# Altium PCB PCB2.PcbDoc
Units mm, origin at the board's own origin, x right, y up, seen from the top; angles counter-clockwise.
Board outline 74.3 x 67.39 mm, 4 copper layers (Top Layer, GND_PLANE, PWR_PLANE, Bottom Layer), stack 0.603 mm thick; 62 components, 65 nets, 250 pads, 141 vias.
Unrouted connection lines stored in the file: 3.
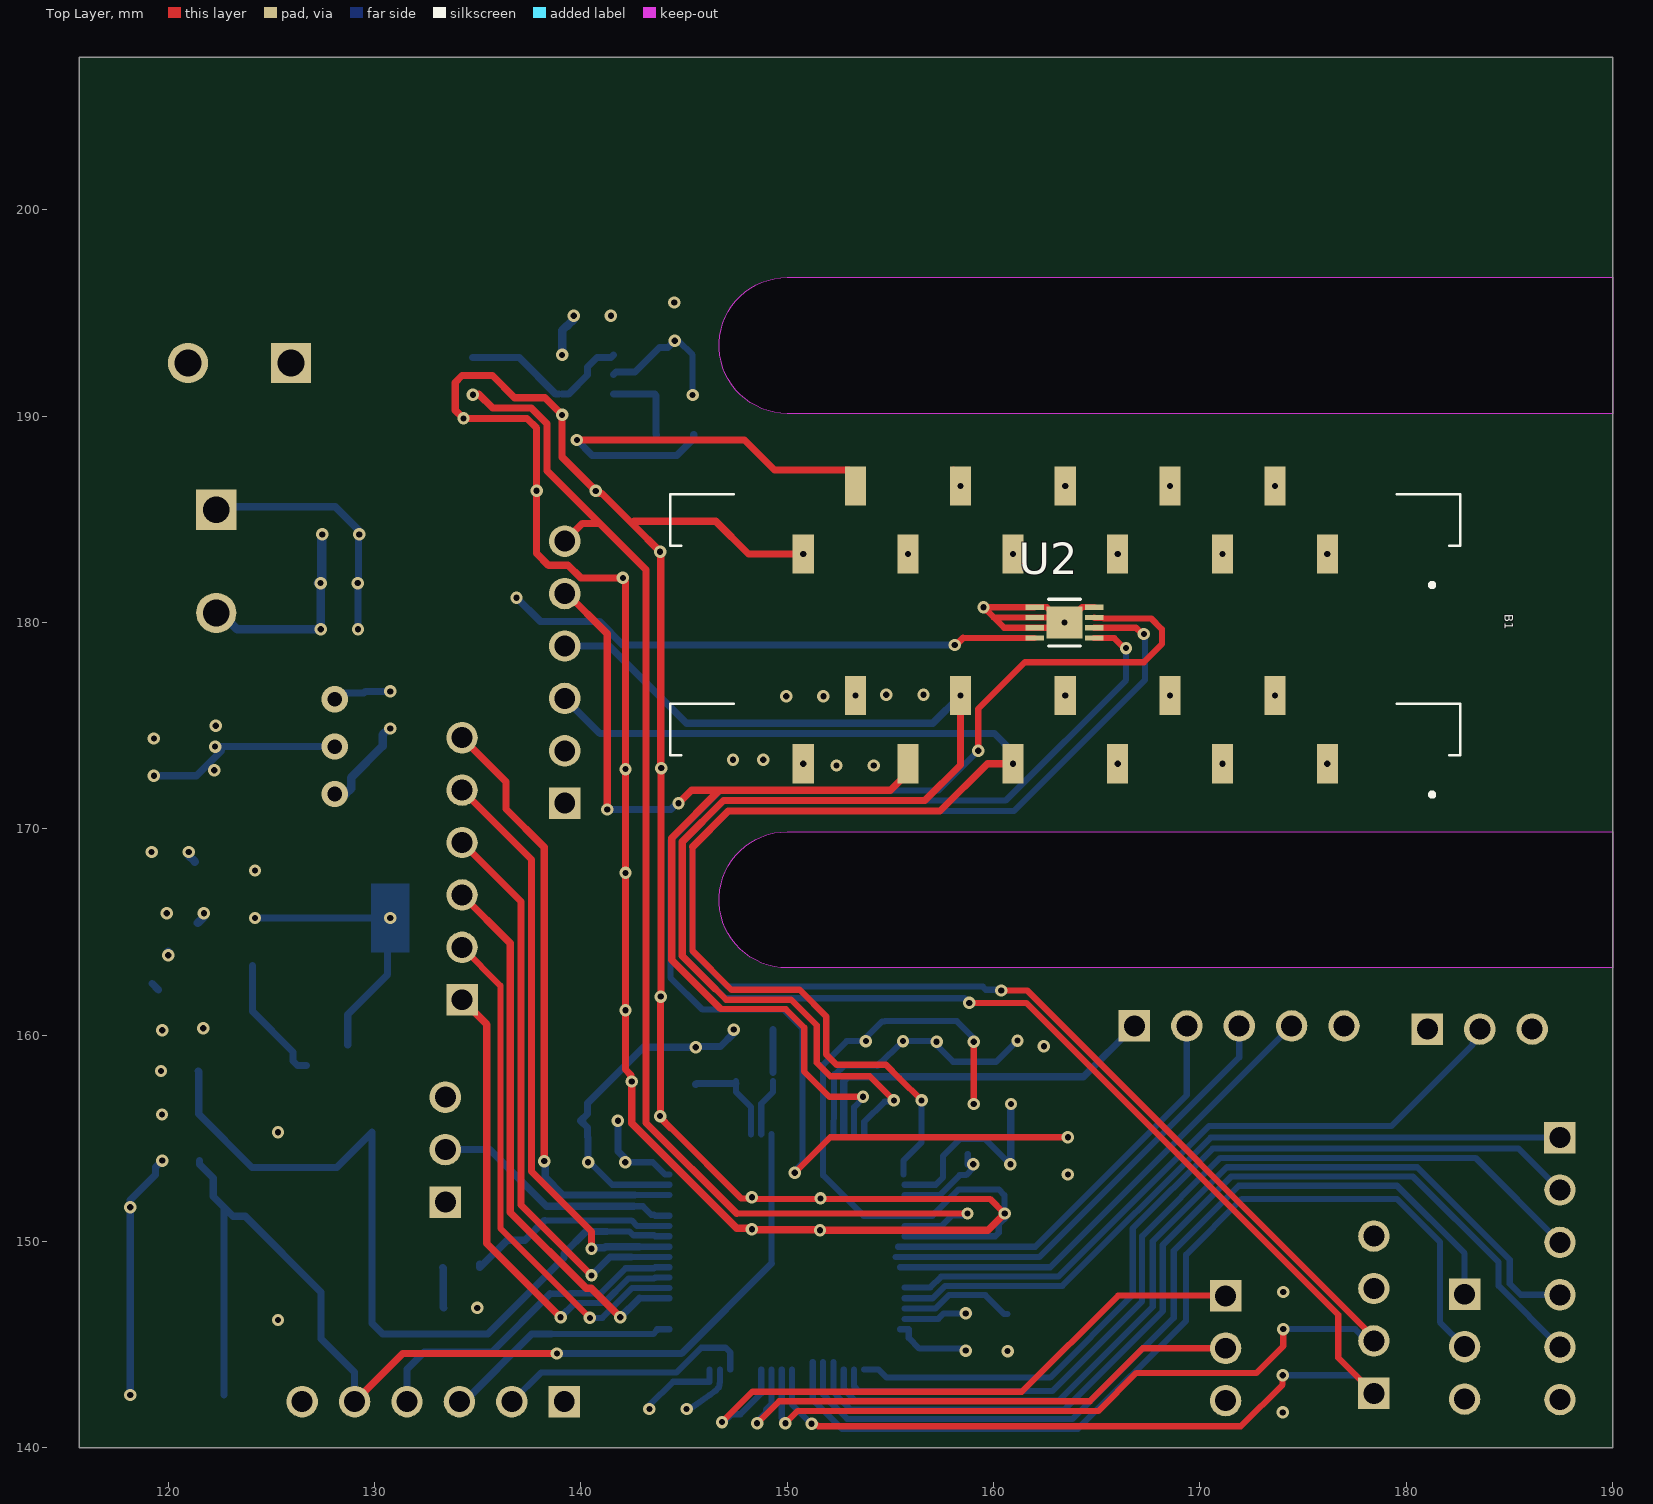
[diagram p0: Top Layer view]
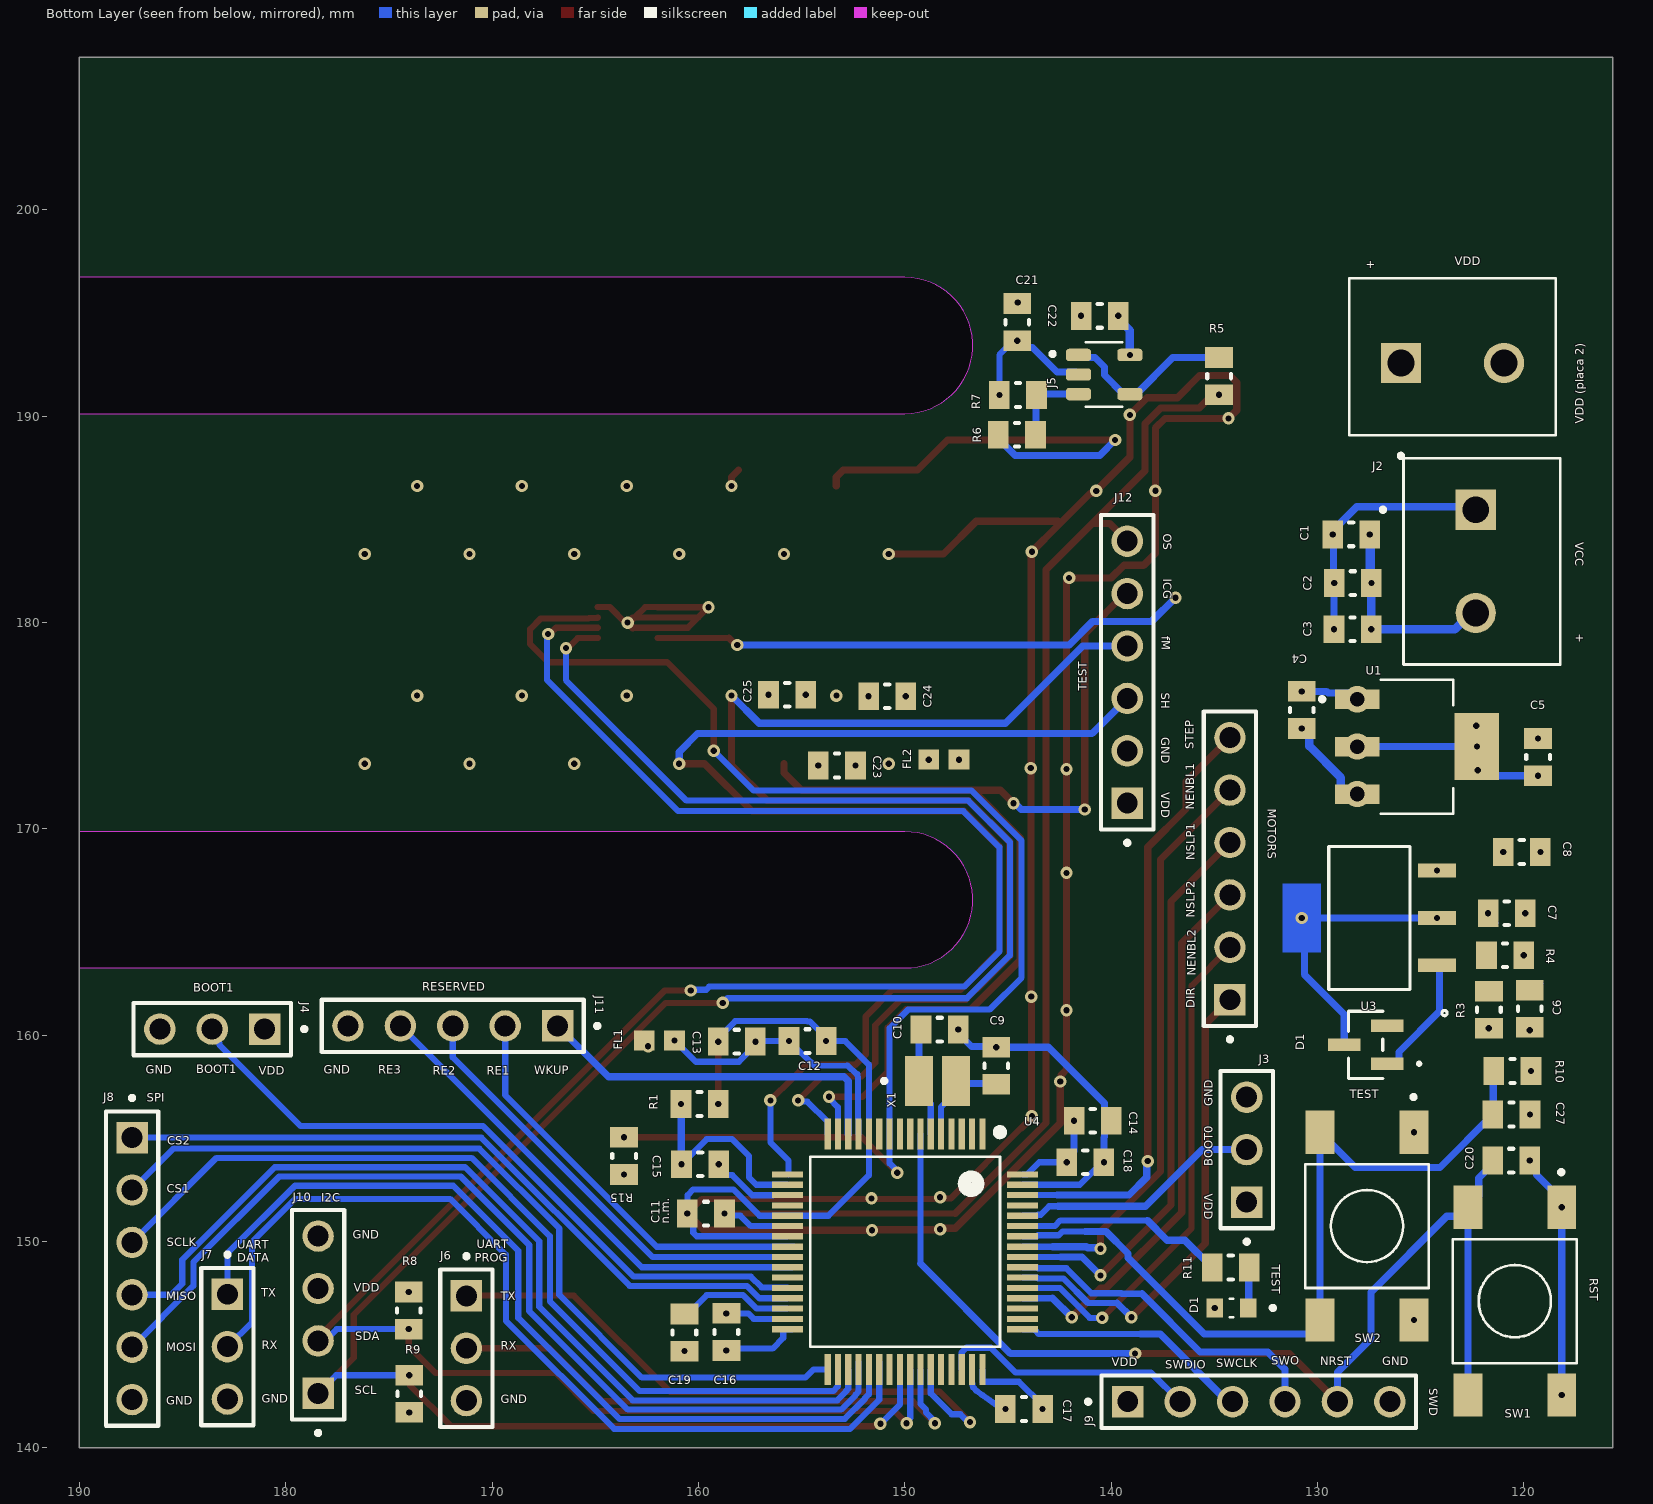
[diagram p1: Bottom Layer view, seen from below]
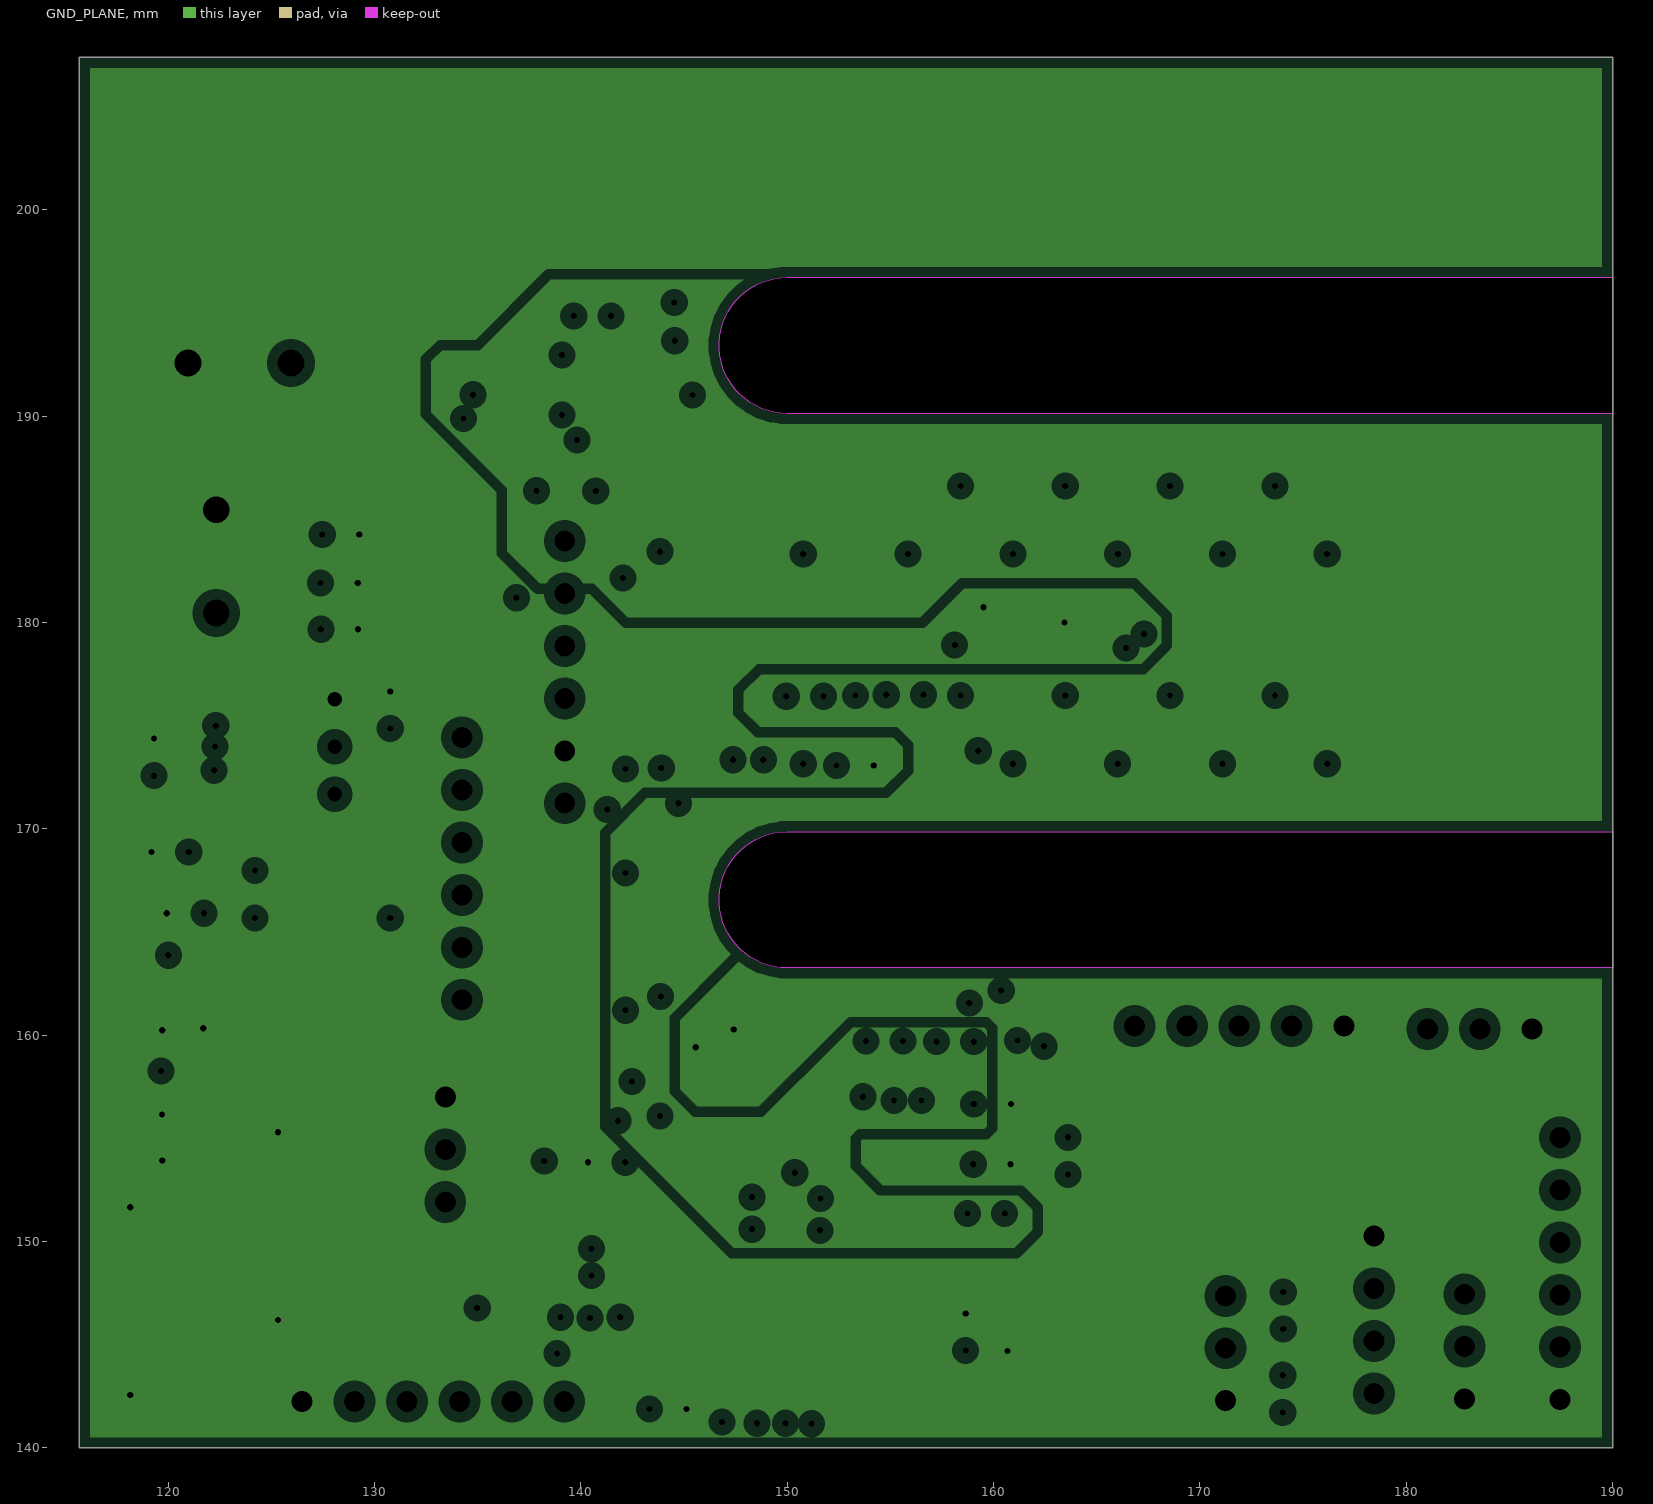
[diagram p2: GND_PLANE, clearances drawn from the general rule]
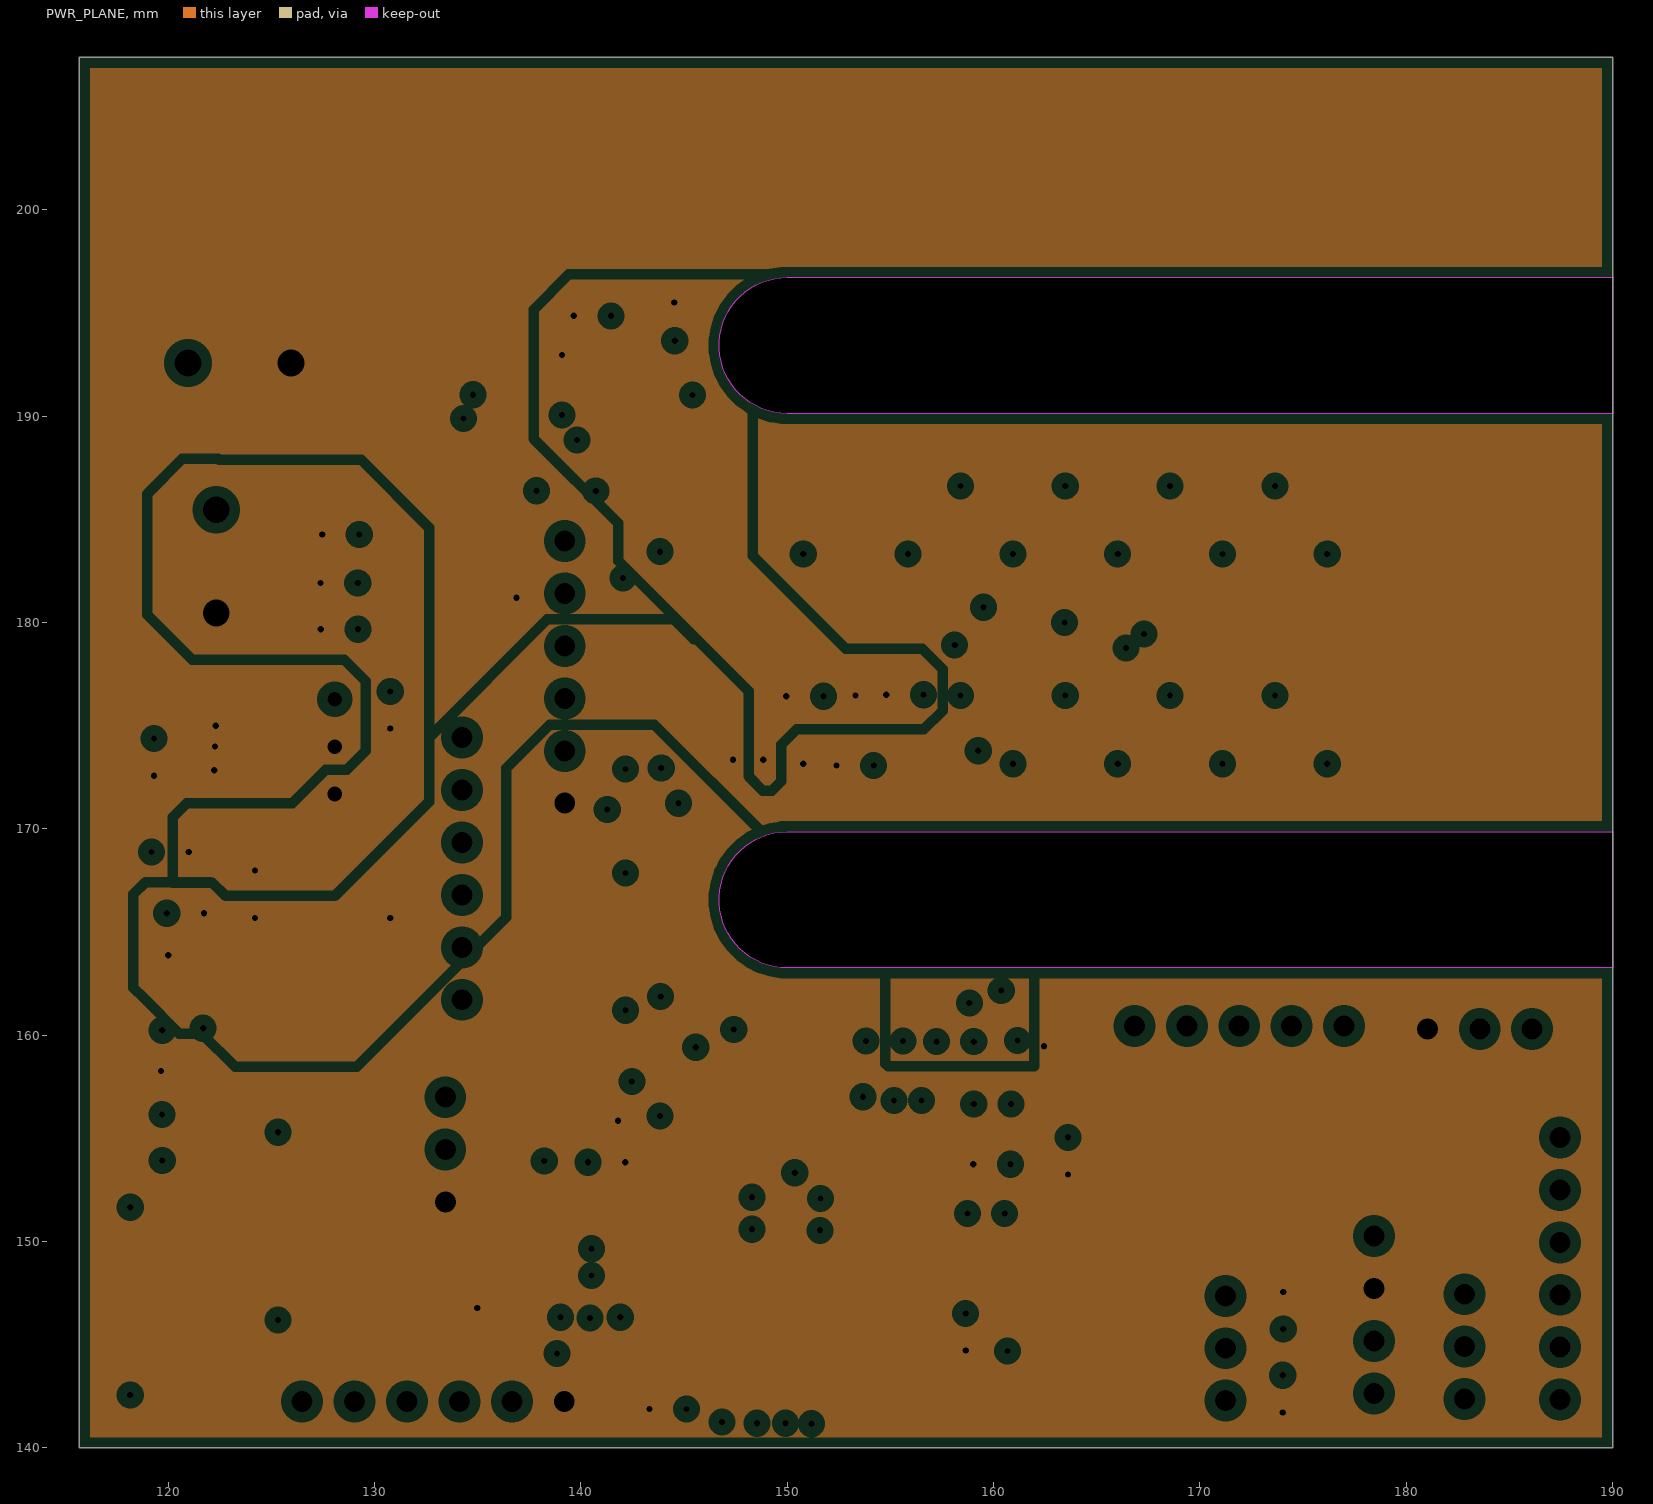
[diagram p3: PWR_PLANE, clearances drawn from the general rule]

## Layer stack, top to bottom
Top Solder: solder mask 0.0102, Solder Resist, Dk 3.5
Top Layer: signal copper 0.0356
Dielectric 2: prepreg 0.0711, PP-006, Dk 4.1
GND_PLANE: plane copper 0.035, net GND
Dielectric 1: dielectric 0.32, FR-4, Dk 4.8
PWR_PLANE: plane copper 0.035, net (Multiple Nets)
Dielectric 3: prepreg 0.0711, PP-006, Dk 4.1
Bottom Layer: signal copper 0.0356
Bottom Solder: solder mask 0.0102, Solder Resist, Dk 3.5

## Board outline
115.697,140 115.697,207.391 190,207.391 190,140
cut-out: 150,163.265 cw(c150,166.565) 150,169.865 190,169.865 190,163.265
cut-out: 150,190.135 cw(c150,193.435) 150,196.735 190,196.735 190,190.135

## Design rules (kind name [scope] priority, off if disabled: settings)
BoardOutlineClearance [All] p1: gap=0.5 ignorepadtopadclearanceinfootprint=FALSE
Clearance Clearance_bridges [All vs InComponent('SB4_MD1') OR InComponent('SB5_MD1') OR InComponent('SB6_MD1') OR InComponent('SB4_MD2') OR InComponent('SB5_MD2') OR InComponent('SB6_MD2')] p1: gap=0.05 ignorepadtopadclearanceinfootprint=FALSE
Clearance [All] p2: gap=0.15 ignorepadtopadclearanceinfootprint=FALSE
PlaneClearance [All] p1: clearance=0.508
PlaneConnect [All] p1: planeconnectstyle=Relief reliefexpansion=0.508 reliefentries=4 reliefconductorwidth=0.254 reliefairgap=0.254
PolygonConnect [All] p1: connectstyle=Relief reliefconductorwidth=0.254 reliefentries=4 polygonreliefangle="90 Angle" airgapwidth=0.254
RoutingVias [All] p1: holewidth=0.6 width=1 viastyle="Through Hole" minholewidth=0.3 minwidth=0.5 maxholewidth=0.3 maxwidth=0.6
ShortCircuit ShortCircuit_bridges [All vs InComponent('SB4_MD1') OR InComponent('SB5_MD1') OR InComponent('SB6_MD1') OR InComponent('SB4_MD2') OR InComponent('SB5_MD2') OR InComponent('SB6_MD2')] p1: allowed=TRUE
ShortCircuit [All] p2: allowed=FALSE
SolderMaskExpansion [All] p1: expansion=0.102 istentingtop=FALSE
SupplyNets "Schematic Supply Nets_3" [InNet('VBB')] p1: voltage=0.000
SupplyNets "Schematic Supply Nets_8" [InNet('VTCDA')] p2: voltage=0.000
SupplyNets "Schematic Supply Nets_7" [InNet('VDD')] p3: voltage=0.000
SupplyNets "Schematic Supply Nets_6" [InNet('PGND')] p4: voltage=0.000
SupplyNets "Schematic Supply Nets_5" [InNet('AGND')] p5: voltage=0.000
SupplyNets "Schematic Supply Nets_4" [InNet('GND')] p6: voltage=0.000
SupplyNets "Schematic Supply Nets_2" [InNet('VDDA')] p7: voltage=0.000
SupplyNets "Schematic Supply Nets_1" [InNet('VCC')] p8: voltage=0.000
SupplyNets "Schematic Supply Nets" [InNet('VTCD')] p9: voltage=0.000
Width Width_bridges [InComponent('SB4_MD1') OR InComponent('SB5_MD1') OR InComponent('SB6_MD1') OR InComponent('SB4_MD2') OR InComponent('SB5_MD2') OR InComponent('SB6_MD2')] p1: maxlimit=0.254 minlimit=0.15 preferedwidth=0.2
Width Width_motores [InNet('VBB')] p2: maxlimit=2 minlimit=0.5 preferedwidth=1
Width [All] p3: maxlimit=1 minlimit=0.2 preferedwidth=0.25
27 further rules are at their usual default settings.

## Classes and differential pairs
channel class MotorDriver: MD1 MD2
component class U_Sensor: B1 C21 C22 C23 C24 C25 FL2 J5 R5 R6 R7 R15 U2
component class U_Power: C1 C2 C3 C4 C5 C6 C7 C8 D1 J2 R1 R3 R4 U1 U3
component class U_Out: C27 D1 J6 J7 J8 J9 J10 J11 J12 R8 R9 R10 R11 SW2
component class U_Microcontroller: C9 C10 C11 C12 C13 C14 C15 C16 C17 C18 C19 C20 FL1 J3 J4 SW1 U4 X1

## Components (designator, comment, footprint, x,y, rotation, side; value= is the part's Value field where it differs from the comment)
B1 "TCD1304DG_8Z_AW_" SOCKET-15_SMD-HARWIN_M20-7861546 163.435,180 r0 top locked
C1 "4.7uF" RES_0805 128.361,184.277 r180 bottom
C2 "100nF" RES_0805 128.284,181.915 r180 bottom
C3 "100pF" RES_0805 128.295,179.68 r180 bottom
C4 "10uF" RES_0805 130.759,175.768 r270 bottom
C5 "10uF" RES_0805 119.304,173.482 r270 bottom
C6 "22uF" RES_0805 119.71,161.29 r90 bottom
C7 "10uF" RES_0805 120.828,165.913 r0 bottom
C8 "10uF" RES_0805 120.091,168.885 r0 bottom
C9 "10pF" RES_0805 145.567,158.521 r270 bottom
C10 "10pF" RES_0805 148.311,160.274 r0 bottom
C11 "100pF not mount" RES_0805 159.639,151.359 r180 bottom
C12 "4.7uF" RES_0805 154.711,159.715 r180 bottom
C13 "100nF" RES_0805 158.14,159.69 r0 bottom
C14 "4.7uF" RES_0805 140.894,155.854 r180 bottom
C15 "100nF" RES_0805 159.918,153.746 r0 bottom
C16 "100nF" RES_0805 158.648,145.618 r90 bottom
C17 "100nF" RES_0805 144.221,141.884 r0 bottom
C18 "100nF" RES_0805 141.249,153.848 r180 bottom
C19 "4.7uF" RES_0805 160.68,145.593 r90 bottom
C20 "100nF" RES_0805 120.61,153.924 r180 bottom
C21 "10uF" RES_0805 144.551,194.564 r270 bottom
C22 "100nF" RES_0805 140.553,194.869 r0 bottom
C23 "10uF" RES_0805 153.289,173.076 r0 bottom
C24 "10uF" RES_0805 150.851,176.428 r0 bottom
C25 "100nF" RES_0805 155.702,176.505 r0 bottom
C27 "100nF" RES_0805 120.599,156.159 r180 bottom
D1 "BAS40-7-F" SOT-23_DIO-M 127.66,159.537 r90 bottom
D1 "LED" LEDC1608X35N 134.163,146.787 r0 bottom
FL1 "BEAD" BEADC1608X95N 161.898,159.741 r180 bottom
FL2 "BEAD" BEADC1608X95N 148.107,173.355 r0 bottom
J2 "Bornera" CUI_TB002-500-02BE 122.326,185.471 r270 bottom
J3 "PIN_HEADER_3" GEN_PIN3 133.426,154.457 r90 bottom
J4 "PIN_HEADER_3" GEN_PIN3 183.566,160.299 r0 bottom
J5 "OPAMP" SOT95P280X145-5N 140.335,192.024 r180 bottom
J6 "PIN_HEADER_3" GEN_PIN3 171.247,144.831 r270 bottom
J7 "PIN_HEADER_3" GEN_PIN3 182.829,144.907 r270 bottom
J8 "PIN_HEADER_6" GEN_PIN6 187.452,148.692 r270 bottom
J9 "PIN_HEADER_6" GEN_PIN6 132.842,142.24 r180 bottom
J10 "PIN_HEADER_4" GEN_PIN4 178.435,146.456 r90 bottom
J11 "PIN_HEADER_5" GEN_PIN5 171.907,160.452 r0 bottom
J12 "PIN_HEADER_6" GEN_PIN6 139.217,177.597 r90 bottom
MOTORS "Comment" GEN_PIN6 134.239,168.072 r90 bottom
R1 "0" RES_0805 159.944,156.667 r0 bottom
R3 "220" RES_0805 121.691,161.239 r90 bottom
R4 "100" RES_0805 120.904,163.881 r0 bottom
R5 "100" RES_0805 134.763,191.947 r90 bottom
R6 "1k" RES_0805 144.566,189.103 r180 bottom
R7 "4.7k" RES_0805 144.515,191.033 r0 bottom
R8 "10k" RES_0805 174.041,146.66 r90 bottom
R9 "10k" RES_0805 174.015,142.621 r270 bottom
R10 "10k" RES_0805 120.548,158.267 r180 bottom
R11 "330" RES_0805 134.203,148.742 r180 bottom
R15 "10k" RES_0805 163.601,154.153 r270 bottom
SW1 "BOTON" SW_4-1437565-2 120.432,147.113 r270 bottom
SW2 "BOTON" SW_4-1437565-2 127.595,150.752 r270 bottom
U1 "NCV1117ST33T3G" SOT230P700X180-4N 125.171,173.99 r180 bottom
U2 "MCP9808T-E/MC" DFN8_2x3MC_MCH-M 163.435,180 r180 top
U3 "NCV1117STAT3G" SOT223-3_ONS-M 127.483,165.684 r90 bottom
U4 "STM32F446RCT6TR" QFP50P1200X1200X160-64N 149.987,149.504 r270 bottom
"VDD (placa 2)" "Comment" CUI_TB002-500-02BE 125.955,192.583 r180 bottom
X1 "CRISTAL-8M" XTALDFN320X250X100-2N 148.412,157.785 r180 bottom

## Footprints (in the part's own frame and the unit in brackets; to place one, negate y for a bottom-side part, rotate by r counter-clockwise, add the part's x,y. Pads: shape width x height; smd on the part's side, far side on the other; paste and mask are expansions set on the pad)
BEADC1608X95N [mm]
  rect 1x0.97 smd: 1(-0.735,0) 2(0.735,0)
  body extent -0.8,-0.4 0.8,0.4, height 0.95
CUI_TB002-500-02BE [mm]
  rect 1.95x1.95 / inner round 1.95 / far side rect 1.95x1.95 hole 1.3: 1(0,0)
  round 1.95 hole 1.3: 2(5,0)
  silkscreen extent -2.5,-4.6 7.5,4.1, body extent -2.52,-4.08 7.98,3.52, height 10
DFN8_2x3MC_MCH-M [mm]
  rect 0.908x0.255 smd paste+0 mask+0: 1(-1.445,0.75) 2(-1.445,0.25) 3(-1.445,-0.25) 4(-1.445,-0.75) 5(1.445,-0.75) 6(1.445,-0.25) 7(1.445,0.25) 8(1.445,0.75)
  rect 1.753x1.549 smd paste+0 mask+0: 9(0,0)
  silkscreen extent -0.77,-1.13 0.77,1.13, body extent -1.5,-1 1.5,1, height 0.94
GEN_PIN3 [mil] "Generic 40 mils drill size, 100 mils step"
  rect 60x60 / inner round 60 / far side rect 60x60 hole 40: 01(-100,0)
  round 60 hole 40: 02(0,0) 03(100,0)
  silkscreen extent -180,-50 150,50, body extent -150,-50 150,50, height 337
GEN_PIN4 [mil] "Generic 40 mils drill size, 100 mils step"
  rect 60x60 hole 40: 01(-150,0)
  round 60 hole 40: 02(-50,0) 03(50,0) 04(150,0)
  silkscreen extent -230,-50 200,50, body extent -200,-50 200,50, height 337
GEN_PIN5 [mil] "Generic 40 mils drill size, 100 mils step"
  rect 60x60 hole 40: 01(-200,0)
  round 60 hole 40: 02(-100,0) 03(0,0) 04(100,0) 05(200,0)
  silkscreen extent -280,-50 250,50, body extent -250,-50 250,50, height 337
GEN_PIN6 [mil] "Generic 40 mils drill size, 100 mils step"
  rect 60x60 / inner round 60 / far side rect 60x60 hole 40: 01(-250,0)
  round 60 hole 40: 02(-150,0) 03(-50,0) 04(50,0) 05(150,0) 06(250,0)
  silkscreen extent -330,-50 300,50, body extent -300,-50 300,50, height 337
LEDC1608X35N [mm]
  rect 0.81x0.93 smd: A(0.81,0) C(-0.81,0)
  silkscreen extent -2.1,-0.45 0.09,0.45, body extent -0.8,-0.4 0.8,0.4, height 0.8
QFP50P1200X1200X160-64N [mm]
  rect 1.5x0.3 smd: 1(-5.7,3.75) 2(-5.7,3.25) 3(-5.7,2.75) 4(-5.7,2.25) 5(-5.7,1.75) 6(-5.7,1.25) 7(-5.7,0.75) 8(-5.7,0.25) 9(-5.7,-0.25) 10(-5.7,-0.75) 11(-5.7,-1.25) 12(-5.7,-1.75) 13(-5.7,-2.25) 14(-5.7,-2.75) 15(-5.7,-3.25) 16(-5.7,-3.75) 33(5.7,-3.75) 34(5.7,-3.25) 35(5.7,-2.75) 36(5.7,-2.25) 37(5.7,-1.75) 38(5.7,-1.25) 39(5.7,-0.75) 40(5.7,-0.25) 41(5.7,0.25) 42(5.7,0.75) 43(5.7,1.25) 44(5.7,1.75) 45(5.7,2.25) 46(5.7,2.75) 47(5.7,3.25) 48(5.7,3.75)
  rect 0.3x1.5 smd: 17(-3.75,-5.7) 18(-3.25,-5.7) 19(-2.75,-5.7) 20(-2.25,-5.7) 21(-1.75,-5.7) 22(-1.25,-5.7) 23(-0.75,-5.7) 24(-0.25,-5.7) 25(0.25,-5.7) 26(0.75,-5.7) 27(1.25,-5.7) 28(1.75,-5.7) 29(2.25,-5.7) 30(2.75,-5.7) 31(3.25,-5.7) 32(3.75,-5.7) 49(3.75,5.7) 50(3.25,5.7) 51(2.75,5.7) 52(2.25,5.7) 53(1.75,5.7) 54(1.25,5.7) 55(0.75,5.7) 56(0.25,5.7) 57(-0.25,5.7) 58(-0.75,5.7) 59(-1.25,5.7) 60(-1.75,5.7) 61(-2.25,5.7) 62(-2.75,5.7) 63(-3.25,5.7) 64(-3.75,5.7)
  silkscreen extent -6.08,-4.6 4.6,4.88, body extent -6,-6 6,6, height 1.6
RES_0805 [mm] "Chip Resistor, 2-Leads, Body 2.00x1.25mm, IPC Medium Density"
  rect 1x1.35 smd: 1(-0.9,0) 2(0.9,0)
  silkscreen extent -0.1,-0.58 0.1,0.58, body extent -1.05,-0.67 1.05,0.67, height 0.6
SOCKET-15_SMD-HARWIN_M20-7861546 [mm]
  rect 1.02x1.9 smd: 1(-12.659,-6.837) 2(-10.119,-3.537) 3(-7.579,-6.837) 4(-5.039,-3.537) 5(-2.499,-6.837) 6(0.041,-3.537) 7(2.581,-6.837) 8(5.121,-3.537) 9(7.661,-6.837) 10(10.201,-3.537) 11(12.741,-6.837) 12(12.741,3.323) 13(10.201,6.623) 14(7.661,3.323) 15(5.121,6.623) 16(2.581,3.323) 17(0.041,6.623) 18(-2.499,3.323) 19(-5.039,6.623) 20(-7.579,3.323) 21(-10.119,6.623) 22(-12.659,3.323)
  silkscreen extent -19.11,-8.44 19.19,6.22, body extent -20.8,-7.08 20.8,7.08, height 11.34
SOT95P280X145-5N [mm]
  rrect50% 1.22x0.6 smd: 1(-1.245,0.95) 2(-1.245,0) 3(-1.245,-0.95) 4(1.245,-0.95) 5(1.245,0.95)
  silkscreen extent -2.6,-1.57 0.88,1.57, body extent -1.35,-1.45 1.35,1.45, height 1.45
SOT223-3_ONS-M [mil]
  rect 26x73 smd paste+0 mask+0: 1(-90.5,-129) 2(0,-129) 3(90.5,-129)
  round 1 smd: 4(0,129)
  Top Layer region: 65,92.5 65,165.5 -65,165.5 -65,92.5
  silkscreen extent -186,-148 136,78, body extent -131,-144 131,144, height 68
SOT230P700X180-4N [mm]
  rect 2.15x0.95 smd paste+0 mask+0.102: 1(-2.9,2.3) 2(-2.9,0) 3(-2.9,-2.3)
  rect 2.15x3.25 smd paste+0 mask+0.102: 4(2.9,0)
  silkscreen extent -4.7,-3.25 1.75,3.25, body extent -3.5,-3.25 3.5,3.25, height 1.8
SOT-23_DIO-M [mil]
  rect 24x62 smd paste+0 mask+0: 1(-36.02,-41) 2(36.02,-41) 3(0,41)
  silkscreen extent -64,-105 64,33, body extent -59,-50 59,50, height 45
SW_4-1437565-2 [mm]
  rect 2.1x1.4 smd: 1(-4.55,2.275) 2(4.55,2.275) 3(-4.55,-2.275) 4(4.55,-2.275)
  silkscreen extent -6.35,-3 3,3, body extent -5,-3 5,3, height 5.38
XTALDFN320X250X100-2N [mm]
  rect 1.37x2.43 smd: 1(-0.9,0) 2(0.9,0)
  silkscreen extent -2.69,-0.1 -2.49,0.1, body extent -1.6,-1.25 1.6,1.25, height 1

## Part data
B1: "Image Sensors & Color Sensors CCD Linear Sensor 3648 8x20 54mm", Manufacturer_Name=Toshiba, Manufacturer_Part_Number=TCD1304DG(8Z,AW), Mouser Part Number=757-TCD1304DG8ZAW, Datasheet Link=https://datasheet.datasheetarchive.com/originals/distributors/DKDS-29/569259.pdf, Geometry.Height=3.72mm, Mouser Price/Stock=https://www.mouser.co.uk/ProductDetail/Toshiba/TCD1304DG8ZAW?qs=OLJpxlzHOSRVMcyirxbASw%3D%3D
C1 C2 C3 C4 C5 C6 C7 C8 C9 C10 C11 C12 C13 C14 C15 C16 C17 C18 C19 C20 C21 C22 C23 C24 C25 C27: library part CAP_0805, "Generic Capacitor"
D1: library part DIODE-BAS40-7-F, "Description", Manufacturer_Name="Diodes Inc", Copyright="Copyright (C) 2025 Ultra Librarian. All rights reserved.", Manufacturer_Part_Number=BAS40-7-F, RefDes=RefDes, Type="Diodes - Rectifiers, Single"
D1: library part LED-LTST-C190KRKT, "Red 631nm LED Indication - Discrete 2V 0603 (1608 Metric)", Package="0603 Lite-On", Availability="In Stock", Check_prices=https://www.snapeda.com/parts/LTST-C190KRKT/Lite-On+Inc./view-part/?ref=eda, MF="Lite-On Inc.", MP=LTST-C190KRKT, Price=None, Purchase-URL=https://pricing.snapeda.com/search/part/LTST-C190KRKT/?ref=eda, SnapEDA_Link=https://www.snapeda.com/parts/LTST-C190KRKT/Lite-On+Inc./view-part/?ref=snap
FL1 FL2: library part FERRITE-BLM18AG601SN1D, "600 Ohms @ 100 MHz 1 - Ferrite Bead 0603 (1608 Metric) 500mA 380mOhm", Package="1608 Murata", Availability="In Stock", Check_prices=https://www.snapeda.com/parts/BLM18AG601SN1D/Murata/view-part/?ref=eda, MF=Murata, MP=BLM18AG601SN1D, Price=None, Purchase-URL=https://pricing.snapeda.com/search/part/BLM18AG601SN1D/?ref=eda, SnapEDA_Link=https://www.snapeda.com/parts/BLM18AG601SN1D/Murata/view-part/?ref=snap
J2: library part 2PBorn-TB002-500-02BE, "2~24 Poles, Screw Type, Horizontal, 5.0 Pitch, 22~12 (AWG), Terminal Block Connector", Package=None, Check_prices=https://www.snapeda.com/parts/TB002-500-02BE/Same+Sky/view-part/?ref=eda, MF="Same Sky", MP=TB002-500-02BE, SnapEDA_Link=https://www.snapeda.com/parts/TB002-500-02BE/Same+Sky/view-part/?ref=snap
J3 J4 J6 J7 J8 J9 J10 J11 J12: "Generic 40 mils drill size, 100 mils step", Package=None, MF="Samtec Inc."
  J3 J4 J6 J7: Check_prices=https://www.snapeda.com/parts/TS-103-T-A/Samtec+Inc./view-part/?ref=eda, MP=TS-103-T-A, SnapEDA_Link=https://www.snapeda.com/parts/TS-103-T-A/Samtec+Inc./view-part/?ref=snap
  J8 J9 J12: Check_prices=https://www.snapeda.com/parts/TS-106-T-A/Samtec+Inc./view-part/?ref=eda, MP=TS-106-T-A, SnapEDA_Link=https://www.snapeda.com/parts/TS-106-T-A/Samtec+Inc./view-part/?ref=snap
  J10: Availability="In Stock", Check_prices=https://www.snapeda.com/parts/TS-104-T-A/Samtec+Inc./view-part/?ref=eda, MP=TS-104-T-A, Price=None, Purchase-URL=https://pricing.snapeda.com/search/part/TS-104-T-A/?ref=eda, SnapEDA_Link=https://www.snapeda.com/parts/TS-104-T-A/Samtec+Inc./view-part/?ref=snap
  J11: Availability="In Stock", Check_prices=https://www.snapeda.com/parts/TS-105-T-A/Samtec+Inc./view-part/?ref=eda, MP=TS-105-T-A, Price=None, Purchase-URL=https://pricing.snapeda.com/search/part/TS-105-T-A/?ref=eda, SnapEDA_Link=https://www.snapeda.com/parts/TS-105-T-A/Samtec+Inc./view-part/?ref=snap
J5: library part OPAMP-MCP6001UT-E/OT, "Microchip MCP6001UT-E/OT Op Amp, 1MHz Rail-Rail, 1.8 - 6 V, 5-Pin SOT-23", Package="SOT-23 Microchip", Check_prices=https://www.snapeda.com/parts/MCP6001UT-E/OT/Microchip/view-part/?ref=eda, MF=Microchip, MP=MCP6001UT-E/OT, SnapEDA_Link=https://www.snapeda.com/parts/MCP6001UT-E/OT/Microchip/view-part/?ref=snap
R1 R3 R4 R5 R6 R7 R8 R9 R10 R11 R15: library part RES_0805, "Generic Capacitor"
SW1 SW2: library part SW-4-1437565-2, "Switch Tactile OFF (ON) SPST Round Button Gull Wing 0.05A 24VDC 1VA 9.18N SMD T/R", Package=None, Check_prices=https://www.snapeda.com/parts/FSM4JSMATR/TE+Connectivity+ALCOSWITCH+Switches/view-part/?ref=eda, MF="TE Connectivity", MP=FSM4JSMATR, SnapEDA_Link=https://www.snapeda.com/parts/FSM4JSMATR/TE+Connectivity+ALCOSWITCH+Switches/view-part/?ref=snap
U1: library part REG3_3-NCV1117ST33T3G, "Linear Voltage Regulator IC Positive Fixed 1 Output 1A SOT-223", Package="SOT-223-4 ON Semiconductor", Check_prices=https://www.snapeda.com/parts/NCV1117ST33T3G/Onsemi/view-part/?ref=eda, MF="ON Semiconductor", MP=NCV1117ST33T3G, SnapEDA_Link=https://www.snapeda.com/parts/NCV1117ST33T3G/Onsemi/view-part/?ref=snap
U2: library part MCP9808T-EMC, "Description", Manufacturer_Name=Microchip, Copyright="Copyright (C) 2026 Ultra Librarian. All rights reserved.", Manufacturer_Part_Number=MCP9808T-E/MC, RefDes=RefDes, Type=Type
U3: "Description", Manufacturer_Name=onsemi, Copyright="Copyright (C) 2025 Ultra Librarian. All rights reserved.", Manufacturer_Part_Number=NCV1117STAT3G, RefDes=RefDes, Type=Type
U4: "ARM® Cortex®-M4 STM32F4 Microcontroller IC 32-Bit Single-Core 180MHz 256KB (256K x 8) FLASH 64-LQFP (10x10)", Package="LQFP-64 STMicroelectronics", Check_prices=https://www.snapeda.com/parts/STM32F446RCT6TR/STMicroelectronics/view-part/?ref=eda, MF=STMicroelectronics, MP=STM32F446RCT6TR, SnapEDA_Link=https://www.snapeda.com/parts/STM32F446RCT6TR/STMicroelectronics/view-part/?ref=snap
X1: library part CRISTAL-CG04874-8M, "8 MHz ±20ppm Crystal 8pF 500 Ohms 2-SMD, No Lead", Package="SMD-2 NDK America,", Check_prices=https://www.snapeda.com/parts/CG04874-8M/NDK+America%252C+Inc./view-part/?ref=eda, MF="NDK America, Inc.", MP=CG04874-8M, SnapEDA_Link=https://www.snapeda.com/parts/CG04874-8M/NDK+America%252C+Inc./view-part/?ref=snap

## Via types
v1: diameter 0.6, hole 0.3, Top Layer to Bottom Layer, 138 vias
v2: diameter 1.27, hole 0.711, Top Layer to Bottom Layer, 3 vias

## Nets (pads, with @x,y where several pads share a name; then routed paths per layer and width w, separated by ;. In a path a pad name is that pad's centre, name@x,y a point inside that pad or via, vN(x,y) a via of type N, cw(c..) or ccw(c..) an arc to the next point about the centre after c; other vN are vias at no path point)
AGND: B1.6 B1.7 B1.8 B1.9 B1.10 B1.11 B1.12 B1.13 B1.14 B1.15 B1.16 B1.17 B1.18 B1.19 B1.20 B1.22 C11.1 C12.2 C13.2 C21.2 C22.2 C24.2 C25.2 J5.2 R1.1 R7.2 U4.12 U4.21 U4.23 | length 175
  Top Layer w0.3: 144.348,155.507 147.767,152.089 148.016,152.089 148.266,152.089 148.285,152.07 159.828,152.07 v1(160.539,151.359) ; v1(159.04,159.69) 159.042,159.688 159.042,156.669 v1(159.044,156.667)
  Top Layer w0.35: v1@143.866,161.807 143.853,161.794 143.853,156.096 v1(143.84,156.083) 143.84,156.015 144.348,155.507 ; v1@143.878,161.819 143.878,172.936 v1(143.891,172.949) 143.866,172.974 143.866,183.413 v1(143.84,183.439) 142.57,184.709 ; v1(150.776,183.323) 148.121,183.323 146.533,184.912 142.57,184.912 142.57,184.709 ; B1.19@158.061,187.398 158.396,187.063 v1(158.396,186.623) ; v1(160.539,151.359) 159.726,150.546 151.663,150.546 151.587,150.622 151.536,150.571 148.336,150.571 148.263,150.644 147.556,150.644 142.469,155.731 v1(142.469,157.759) 142.421,157.807 142.421,158.078 142.164,158.335 v1(142.164,161.214) v1(142.164,167.869) v1(142.164,172.898) 142.164,181.974 142.037,182.101 v1(142.037,182.169) 139.993,182.169 139.376,182.786 138.423,182.786 137.854,183.355 v1(137.854,186.392) 137.854,189.429 137.385,189.898 v1(134.307,189.898) 133.909,190.297 133.909,191.643 134.239,191.973 135.712,191.973 136.781,190.904 138.255,190.904 v1(139.09,190.068) 139.09,188.011 v1(140.716,186.385) 140.764,186.337 140.831,186.337 140.909,186.26 141.019,186.26 141.846,185.433 142.57,184.709
  Bottom Layer w0.3: v1(144.551,193.664) 144.726,193.664 145.415,192.975 v1(145.415,191.033) ; U4.23 160.08,150.254 160.256,150.43 160.256,150.834 160.53,151.107 C11.1@160.539,151.107 ; v1(159.04,159.69) 159.04,159.865 158.215,160.69 154.736,160.69 154.711,160.665 154.586,160.665 153.811,159.89 v1(153.811,159.715) 152.883,159.715 151.737,158.57 U4.12 151.737,153.215 153.698,151.254 U4.21 157.036,151.254 158.308,152.527 160.257,152.527 160.528,152.256 160.528,151.369 v1(160.539,151.359)
  Bottom Layer w0.35: J5.2 141.705,192.149 142.619,192.149 143.809,193.339 144.226,193.339 v1(144.551,193.664)
  other v1: 151.587,150.546 148.285,150.597 151.613,152.095 148.285,152.146 143.866,161.874 166.016,173.163 171.096,173.163 176.176,173.163 151.751,176.428 163.476,176.463 168.556,176.463 173.636,176.463 156.602,176.505 155.856,183.323 160.936,183.323 166.016,183.323 171.096,183.323 176.176,183.323 163.476,186.623 168.556,186.623 173.636,186.623 141.453,194.869
BOOT0: J3.02 U4.60 | length 12.2
  Bottom Layer w0.3: 142.563,151.714 143.003,151.714 143.413,151.304 143.549,151.304 143.599,151.254 U4.60
  Bottom Layer w0.35: J3.02 135.585,154.457 138.328,151.714 142.563,151.714
BOOT1: J4.02 U4.28 | length 33.3
  Bottom Layer w0.3: U4.28@155.687,147.777 156.935,147.777 157.462,148.304 163.146,148.304 170.438,155.596 179.284,155.596 183.22,159.531 183.22,159.622 183.566,159.968 J4.02
BUTTON: C27.1 R10.1 SW2.3 SW2.4 U4.58 | length 38.4
  Bottom Layer w0.3: 141.248,150.495 142.352,150.495 142.542,150.304 143.549,150.304 143.599,150.254 U4.58
  Bottom Layer w0.35: R10.1 121.474,158.242 121.474,156.185 C27.1 124.065,153.594 128.162,153.594 SW2.3 SW2.4 129.87,146.042 130.395,145.517 135.484,145.517 139.186,149.219 139.186,149.422 140.259,150.495 141.248,150.495
CS1: J8.02 U4.33 | length 41.2
  Bottom Layer w0.3: U4.33 154.417,143.804 154.813,143.408 162.738,143.408 166.751,147.422 166.751,150.636 170.62,154.505 185.449,154.505 J8.02
CS2: J8.01 U4.29 | length 35
  Bottom Layer w0.3: U4.29 157.048,147.254 157.648,147.854 163.333,147.854 170.52,155.042 J8.01
fM: B1.4 J12.04 U4.16 | length 61.9
  Top Layer w0.3: 146.511,162.247 147.037,161.722 150.19,161.722 151.428,160.484 151.428,158.672 152.087,158.014 154,158.014 v1(155.169,156.845)
  Top Layer w0.35: 146.511,162.247 144.915,163.843 144.915,169.375 146.914,171.374 156.667,171.374 158.396,173.102 v1(158.396,176.463)
  Bottom Layer w0.3: U4.16 153.737,155.804 154.72,156.788 155.111,156.788 v1(155.169,156.845)
  Bottom Layer w0.35: J12.04 141.376,178.867 145.118,175.125 157.057,175.125 v1(158.396,176.463)
GND: "VDD (placa 2).2" C1.1 C2.1 C3.1 C4.1 C5.1 C6.1 C7.1 C8.1 C9.1 C10.1 C14.2 C15.2 C16.2 C17.2 C18.2 C19.1 C20.2 C23.2 C27.2 J2.1 J3.03 J4.03 J6.03 J7.03 J8.06 J9.06 J10.04 J11.05 J12.02 R1.2 R3.1 SW1.1 SW1.2 SW2.1 SW2.2 U1.1 U2.4 U2.5 U2.6 U2.7 U2.9 U4.18 U4.31 U4.47 U4.63 | length 73.2
  Top Layer w0.3: U2.9@163.185,179.75 U2.7 160.508,179.75 160.008,180.25 ; U2.9@163.197,180.136 U2.9@163.083,180.25 ; U2.9@163.208,180.227 163.185,180.25 U2.9@163.083,180.25 ; U2.9@163.233,180.173 U2.9@163.406,180 ; U2.9@163.537,180 164.287,180.75 U2.4 ; 160.008,180.25 U2.6 U2.9@163.083,180.25 ; 160.008,180.25 v1(159.512,180.746) 159.514,180.748 161.989,180.748 U2.5 162.583,180.75 U2.9@163.083,180.25
  Top Layer w0.35: U2.9@163.185,179.75 v1(163.435,180) U2.9@163.537,180
  Bottom Layer w0.3: C18.2@140.375,153.899 141.519,152.754 U4.63 ; C17.2@145.17,141.814 145.471,142.023 146.247,142.56 146.511,142.754 146.687,142.93 146.737,143.204 U4.47 ; U4.31 157.321,146.254 157.585,146.518 v1(158.648,146.518) C16.2@158.829,146.518 ; U4.18 157.199,152.754 157.556,153.111 157.556,154.153 158.369,154.965 159.599,154.965 v1(160.818,153.746)
  Bottom Layer w0.35: v1(118.157,142.563) v1(118.157,151.663) 118.157,152.013 119.385,153.241 119.385,153.599 v1(119.71,153.924) ; C8.1@119.14,168.834 v1(119.191,168.885) ; J2.1@122.326,185.619 128.093,185.619 129.261,184.452 v1(129.261,184.277) 129.222,184.239 129.222,181.942 129.19,181.909 129.19,179.86 129.195,179.855 v1(129.195,179.68) ; v2(128.071,176.29) 128.371,176.59 129.481,176.59 129.559,176.668 v1(130.759,176.668) ; v1(140.349,153.848) 140.349,155.048 140.319,155.078 140.319,155.529 C14.2 140.319,156.179 140.319,156.702 143.038,159.421 v1(145.567,159.421) 145.602,159.456 146.767,159.456 147.411,160.099 v1(147.411,160.274) ; C17.2@145.035,141.971 v1(145.121,141.884) ; v1(160.818,153.746) 160.831,153.759 160.831,156.654 v1(160.844,156.667)
  other v1: 160.68,144.693 125.32,146.202 125.32,155.302 119.699,156.159 119.71,160.24 121.691,160.339 119.928,165.913 154.189,173.076 119.304,174.382 129.184,181.915
ICG: B1.3 J12.05 U4.15 | length 51.6
  Top Layer w0.3: 146.736,161.315 146.779,161.272 149.929,161.272 150.825,160.376 150.825,158.241 152.044,157.023 v1(153.67,157.023)
  Top Layer w0.35: J12.05@139.274,181.463 141.275,179.463 v1(141.275,170.942) ; v1(144.729,171.247) 145.356,171.874 146.706,171.874 ; 146.736,161.315 144.399,163.652 144.399,169.566 146.706,171.874 ; B1.3 155.856,172.723 155.006,171.874 146.706,171.874
  Bottom Layer w0.3: U4.15 153.237,156.509 153.67,156.942 v1(153.67,157.023)
  Bottom Layer w0.35: v1(141.275,170.942) 144.357,170.942 144.662,171.247 v1(144.729,171.247)
LED: R11.1 U4.59 | length 10.4
  Bottom Layer w0.3: 138.249,151.028 142.455,151.028 142.729,150.754 U4.59
  Bottom Layer w0.35: R11.1@135.103,148.917 R11.1 136.427,150.067 137.288,150.067 138.249,151.028
MISO: J8.04 U4.35 | length 45.7
  Bottom Layer w0.3: U4.35 152.737,142.871 152.837,142.771 152.837,142.744 153.276,142.304 163.183,142.304 167.716,146.837 167.716,150.012 171.309,153.605 180.532,153.605 185.014,149.123 185.014,147.956 185.548,147.422 J8.04
MOSI: J8.05 U4.36 | length 47.7
  Bottom Layer w0.3: U4.36@152.236,144.161 152.236,142.735 152.387,142.585 152.387,142.557 153.09,141.854 163.419,141.854 168.199,146.634 168.199,149.835 171.519,153.155 180.322,153.155 184.48,148.996 184.48,147.853 J8.05
NetB1_21: B1.21 R6.1 | length 21.2
  Top Layer w0.35: v1(139.805,188.849) 147.93,188.849 149.38,187.398 152.981,187.398 153.316,187.063 B1.21
  Bottom Layer w0.35: v1(139.805,188.849) 140.551,188.103 144.641,188.103 145.466,188.928 R6.1
NetC6_2: C6.2 D1.1 R3.2 R4.2 U3.1 | length 6.6
  Bottom Layer w0.35: C6.2@119.21,162.515 C6.2@119.521,162.204 ; U3.1@124.079,163.386 124.079,161.162 126.052,159.19 126.052,158.752 126.265,158.539 D1.1@126.702,158.539
NetC19_2: C19.2 U4.30 | length 5.6
  Bottom Layer w0.3: U4.30 157.185,146.754 157.835,147.404 159.594,147.404 160.505,146.493 C19.2
NetD1_C: D1.C R11.2 | length 2
  Bottom Layer w0.35: R11.2 133.328,148.717 133.328,146.812 D1.C
NetJ5_1: J5.1 J5.4 R5.2 | length 8.4
  Bottom Layer w0.35: R5.2 137.007,192.847 138.78,191.074 J5.4@138.925,191.074 ; J5.4 139.4,191.074 140.324,191.998 140.324,192.394 140.779,192.849 141.455,192.849 J5.1
NetJ5_3: J5.3 R6.2 R7.1 | length 4
  Bottom Layer w0.35: J5.3 143.574,191.074 R7.1 143.64,191.008 143.64,189.128 R6.2
NetJ13_MD1_01: 
NetJ13_MD1_02: 
NetJ13_MD1_03: 
NetJ13_MD1_04: 
NetJ13_MD2_01: 
NetJ13_MD2_02: 
NetJ13_MD2_03: 
NetJ13_MD2_04: 
NetP1_MD1_1: MOTORS.05 U4.57 | length 28.6
  Top Layer w0.35: MOTORS.05 137.602,168.519 137.602,153.395 140.513,150.484 v1(140.513,149.654)
  Bottom Layer w0.3: 142.823,149.754 U4.57
  Bottom Layer w0.35: v1(140.513,149.654) 140.561,149.702 141.147,149.702 141.199,149.754 142.823,149.754
NetP1_MD1_2: 
NetP1_MD1_3: 
NetP1_MD1_4: 
NetP1_MD1_5: MOTORS.04 U4.56 | length 27.7
  Top Layer w0.35: MOTORS.04 137.102,166.479 137.102,151.772 v1(140.513,148.361)
  Bottom Layer w0.3: 142.439,149.254 U4.56
  Bottom Layer w0.35: v1(140.513,148.361) 141.406,149.254 142.439,149.254
NetP1_MD1_7: MOTORS.06 U4.62 | length 29.3
  Top Layer w0.35: MOTORS.06 136.373,172.288 136.373,170.967 138.227,169.113 v1(138.227,153.899)
  Bottom Layer w0.3: 142.621,152.254 U4.62
  Bottom Layer w0.35: v1(138.227,153.899) 138.275,153.851 138.275,153.114 139.134,152.254 142.621,152.254
NetP1_MD1_8: MOTORS.01 U4.54 | length 23.4
  Top Layer w0.35: MOTORS.01 135.433,160.528 135.433,149.911 v1(139.014,146.329)
  Bottom Layer w0.3: 139.709,147.024 141.119,147.024 142.3,148.204 143.549,148.204 143.599,148.254 U4.54
  Bottom Layer w0.35: v1(139.014,146.329) 139.709,147.024
NetP1_MD2_1: MOTORS.02 U4.53 | length 25
  Top Layer w0.3: MOTORS.02 136.101,162.4 136.101,150.64 v1(140.437,146.304)
  Bottom Layer w0.3: v1(140.437,146.304) 141.036,146.304 142.486,147.754 U4.53
NetP1_MD2_2: 
NetP1_MD2_3: 
NetP1_MD2_4: 
NetP1_MD2_5: MOTORS.03 U4.52 | length 26.6
  Top Layer w0.35: MOTORS.03 136.576,164.465 136.576,151.415 140.254,147.736 140.503,147.736 v1(141.91,146.329)
  Bottom Layer w0.3: 142.835,147.254 U4.52
  Bottom Layer w0.35: v1(141.91,146.329) 142.835,147.254
NetR15_1: R15.1 U2.3 U4.10 | length 68.4
  Top Layer w0.3: v1(150.368,153.34) 152.081,155.053 v1(163.601,155.053) ; v1(159.258,173.787) 159.258,175.819 161.519,178.079 167.284,178.079 168.162,178.957 168.162,179.682 167.643,180.2 165.331,180.2 165.303,180.227 164.902,180.227 U2.3
  Bottom Layer w0.3: v1(150.368,153.34) 150.368,153.421 150.737,153.79 U4.10 150.737,160.347 149.835,161.249 145.886,161.249 144.336,162.799 144.336,169.433 146.76,171.856 157.328,171.856 v1(159.258,173.787)
NRST: C20.1 J9.05 SW1.3 SW1.4 U4.7 | length 53.5
  Top Layer w0.35: J9.05 131.369,144.577 v1(138.836,144.577)
  Bottom Layer w0.3: 149.237,148.932 U4.7
  Bottom Layer w0.35: C20.1 121.51,153.749 122.182,153.077 122.182,152.188 SW1.3 ; SW1.4 122.707,151.313 SW1.3 ; J9.05 129.032,143.662 127.406,145.288 127.406,147.549 123.727,151.228 123.143,151.228 SW1.3 ; v1(138.836,144.577) 144.882,144.577 149.237,148.932
OS: C11.2 J12.06 R5.1 U4.22 | length 62.5
  Top Layer w0.3: 147.549,151.359 v1(158.739,151.359)
  Top Layer w0.35: v1@135.052,191.073 135.727,190.398 137.592,190.398 138.354,189.636 138.354,187.363 140.906,184.81 ; J12.06 140.081,184.81 140.906,184.81 ; 147.549,151.359 143.154,155.753 143.154,182.562 140.906,184.81
  Bottom Layer w0.3: U4.22 157.46,150.754 157.965,151.259 158.64,151.259 v1(158.739,151.359)
  other v1: 134.763,191.047
OSC1: C9.2 U4.5 X1.2 | length 4.8
  Bottom Layer w0.3: X1.2 147.512,157.255 148.237,156.53 U4.5
  Bottom Layer w0.35: C9.2 145.607,157.661 X1.2@147.512,157.661
OSC2: C10.2 U4.6 X1.1 | length 4.9
  Bottom Layer w0.3: U4.6 148.737,156.68 149.312,157.255 X1.1
  Bottom Layer w0.35: X1.1@149.312,158.191 C10.2@149.312,160.274
PGND: 
RES1: J11.02 U4.24 | length 20.4
  Bottom Layer w0.3: U4.24@155.364,149.754 162.023,149.754 169.367,157.099 J11.02
RES2: J11.03 U4.25 | length 22.2
  Bottom Layer w0.3: U4.25@155.25,149.254 162.232,149.254 171.907,158.929 J11.03
RES3: J11.04 U4.26 | length 23.8
  Bottom Layer w0.3: U4.26@155.466,148.754 162.75,148.754 J11.04
RX_D: J7.02 U4.38 | length 45.7
  Bottom Layer w0.3: U4.38@151.236,144.161 151.236,142.337 152.654,140.919 164.084,140.919 169.329,146.164 169.329,149.365 172.034,152.07 179.553,152.07 181.635,149.987 181.635,146.101 J7.02
RX_P: J6.02 U4.42 | length 27.1
  Top Layer w0.3: v1(148.539,141.199) 149.606,142.265 164.668,142.265 167.234,144.831 J6.02
  Bottom Layer w0.3: v1(148.539,141.199) 148.539,141.28 148.978,141.718 148.978,141.865 149.237,142.124 U4.42
SCL: J10.01 R9.1 U2.1 U4.40 | length 109.1
  Top Layer w0.3: v1(151.181,141.173) 151.238,141.116 151.437,141.116 151.507,141.046 171.983,141.046 174.006,143.069 174.006,143.512 v1(174.015,143.521) ; v1(158.826,161.569) 161.595,161.569 176.708,146.456 176.708,144.374 J10.01 ; U2.1 165.855,179.25 166.34,178.765 v1(166.421,178.765)
  Bottom Layer w0.3: U4.40 150.237,142.102 151.166,141.173 v1(151.181,141.173) ; v1(158.826,161.569) 158.598,161.798 146.99,161.798 144.907,163.881 144.907,169.367 146.914,171.374 160.579,171.374 166.421,177.216 v1(166.421,178.765) ; v1(174.015,143.521) 177.56,143.521 J10.01
SCLK: J8.03 U4.34 | length 43.4
  Bottom Layer w0.3: U4.34 153.237,142.98 153.463,142.754 162.846,142.754 167.201,147.11 167.201,150.259 170.997,154.055 183.359,154.055 J8.03
SDA: J10.02 R8.1 U2.2 U4.41 | length 109.9
  Top Layer w0.3: v1(149.911,141.199) 150.495,141.783 165.072,141.783 166.926,143.637 172.745,143.637 174.041,144.932 v1(174.041,145.76) ; v1(160.376,162.169) 161.631,162.169 178.435,145.366 J10.02 ; U2.2 166.904,179.75 167.203,179.451 v1(167.284,179.451)
  Bottom Layer w0.3: U4.41 149.737,141.454 149.911,141.28 v1(149.911,141.199) ; v1(160.376,162.169) 160.338,162.207 159.626,162.207 159.476,162.357 147.117,162.357 145.415,164.059 145.415,169.113 147.168,170.866 160.985,170.866 167.335,177.216 167.335,179.4 v1(167.284,179.451) ; v1(174.041,145.76) 177.531,145.76 178.104,145.186 J10.02
SH: B1.5 J12.03 U4.17 | length 64.7
  Top Layer w0.3: 145.415,169.139 145.415,164.084 147.295,162.204 150.597,162.204 151.892,160.909 151.892,159.068 152.388,158.572 154.788,158.572 155.44,157.92 v1(156.515,156.845)
  Top Layer w0.35: 145.415,169.139 147.142,170.866 157.404,170.866 159.701,173.163 v1(160.936,173.163)
  Bottom Layer w0.3: U4.17@155.636,153.254 155.636,153.934 156.515,154.813 v1(156.515,156.845)
  Bottom Layer w0.35: J12.03 140.919,174.625 160.045,174.625 160.936,173.735 v1(160.936,173.163)
SWCLK: J9.03 U4.49 | length 11.7
  Bottom Layer w0.3: 138.567,145.517 143.511,145.517 143.687,145.692 143.687,145.754 U4.49
  Bottom Layer w0.35: J9.03 134.341,142.24 137.617,145.517 138.567,145.517
SWDIO: J9.02 U4.46 | length 12.6
  Bottom Layer w0.3: J9.02 138.066,143.654 144.631,143.654 145.831,144.854 147.011,144.854 147.237,144.629 U4.46
SWO: J9.04 U4.55 | length 16.3
  Bottom Layer w0.3: 138.506,147.472 139.485,147.472 139.512,147.499 140.958,147.499 142.163,148.704 143.549,148.704 143.599,148.754 U4.55
  Bottom Layer w0.35: J9.04 131.572,143.815 132.41,144.653 135.687,144.653 138.506,147.472
TX_D: J7.01 U4.37 | length 43.1
  Bottom Layer w0.3: U4.37@151.736,144.161 151.736,142.599 151.937,142.398 151.937,142.371 152.904,141.404 163.833,141.404 168.732,146.304 168.732,149.555 171.882,152.705 179.554,152.705 182.829,149.43 J7.01
TX_P: J6.01 U4.43 | length 30.6
  Top Layer w0.3: v1(146.837,141.249) 148.311,142.723 161.371,142.723 166.033,147.384 171.234,147.384 J6.01
  Bottom Layer w0.3: v1(146.837,141.249) 146.919,141.249 147.301,141.632 147.728,141.632 148.737,142.641 U4.43
VBB: 
VCC: C1.2 C2.2 C3.2 C4.2 C8.2 J2.2 U1.3 U3.3 | length 17.7
  Bottom Layer w0.406: v1(120.991,168.885) 120.991,168.712 C8.2@121.288,168.415 ; J2.2 122.545,180.471 123.336,179.68 v1(127.395,179.68) 127.39,179.685 C2.2@127.39,181.77 ; C2.2@127.245,181.915 C2.2@127.423,182.092 ; v1(127.384,181.915) 127.423,181.953 C1.2@127.423,184.301 ; C2.2@127.461,181.953 v1(127.461,184.277) ; v2(128.071,171.69) 128.599,171.69 128.871,171.962 128.871,172.49 130.392,174.011 130.392,174.571 130.689,174.868 v1(130.759,174.868)
  other v1: 124.206,167.983
VDD: "VDD (placa 2).1" C5.2 C14.1 C15.1 C16.1 C17.1 C18.1 D1.A FL1.1 J3.01 J4.01 J9.01 J10.03 J12.01 R8.2 R9.2 R10.2 R15.2 U1.2 U1.4 U2.8 U4.19 U4.32 U4.48 U4.64 | length 53.6
  Top Layer w0.3: 158.515,179.25 U2.8
  Top Layer w0.35: v1(158.115,178.918) 158.183,178.918 158.515,179.25
  Bottom Layer w0.3: v1(142.149,153.848) 143.48,153.848 144.073,153.254 U4.64 ; v1(143.321,141.884) 143.321,142.059 144.466,143.204 146.237,143.204 U4.48 ; U4.32@155.464,145.754 U4.32 155.888,145.754 155.888,145.33 156.404,144.815 158.61,144.815 C16.1@158.706,144.718 ; U4.19 156.375,152.254 156.382,152.248 157.392,152.248 158.366,153.221 158.668,153.221 159.018,153.571 v1(159.018,153.746) C15.1@159.018,153.921 ; C15.1@158.748,153.745 C15.1@158.748,154.244
  Bottom Layer w0.35: v1(119.304,172.582) 121.371,172.582 122.587,173.797 U1.4@122.587,173.99 ; v1(122.271,173.99) U1.4@122.587,173.99 ; v2(128.071,173.99) U1.4@122.587,173.99 ; v1(136.881,181.204) 138.024,180.061 140.89,180.061 142.033,178.918 v1(158.115,178.918) ; v1(141.794,155.854) 141.794,154.378 142.149,154.023 v1(142.149,153.848) ; C15.1@158.77,153.751 159.013,153.751 v1(159.018,153.746)
  other v1: 174.015,141.721 158.648,144.718 134.973,146.787 174.041,147.56 163.601,153.253 119.648,158.267 162.439,159.47 122.225,172.847 122.301,175.006
VDDA: C12.1 C13.1 FL1.2 U4.13 | length 13.5
  Bottom Layer w0.3: U4.13 152.262,156.606 ccw(c151.962,156.611) 152.262,156.611 152.262,157.893 cw(c152.562,157.893) 152.266,157.939 152.285,158.066 ccw(c151.989,158.112) 152.289,158.106 ; 152.289,158.107 152.288,158.055 152.313,158.08 152.788,158.538 154.363,158.51 v1(155.611,159.715) 157.215,159.715 v1(157.24,159.69) 157.24,159.515 158.04,158.715 160.122,158.715 161.148,159.741 v1(161.163,159.741)
VTCD: B1.1 C7.2 C23.1 D1.3 FL2.1 R4.1 U3.2 U3.4 | length 14.3
  Bottom Layer w0.35: v1(124.206,165.684) v1(130.759,165.684) 130.759,164.811 130.632,164.684 130.632,162.94 128.702,161.01 D1.3
  Bottom Layer w0.406: v1(120.004,163.881) R4.1@120.004,164.056 ; C7.2@121.431,165.441 121.728,165.738 v1(121.728,165.913) ; v1(147.372,173.355) FL2.1@147.387,173.355
  other v1: 152.389,173.076 150.776,173.163
VTCDA: B1.2 C21.1 C22.1 C24.1 C25.1 FL2.2 J5.5 | length 2.1
  Bottom Layer w0.406: v1(139.09,192.974) 139.09,194.159 139.328,194.397 139.356,194.397 139.653,194.694 v1(139.653,194.869)
  other v1: 148.842,173.355 149.951,176.428 153.316,176.463 154.802,176.505 144.526,195.518
WKUP: J11.01 U4.14 | length 17.8
  Bottom Layer w0.35: U4.14 152.737,157.783 152.942,157.988 164.363,157.988 J11.01
pads on no net: D1.2 U4.1 U4.2 U4.3 U4.4 U4.8 U4.9 U4.11 U4.20 U4.27 U4.39 U4.44 U4.45 U4.50 U4.51 U4.61

## Polygon pours and split planes (outlines as drawn)
GND on GND_PLANE (split plane): 162 vertices, not listed, extent 116.207,140.51 189.49,206.881
GND on GND_PLANE (split plane): 208 vertices, not listed, extent 132.743,149.684 189.49,196.619
VDD on PWR_PLANE (split plane): 192 vertices, not listed, extent 116.207,140.51 189.49,206.881
VTCD on PWR_PLANE (split plane): 149.07,189.731 149.109,189.722 149.147,189.712 149.66,189.631 149.7,189.628 149.74,189.625 189.49,189.625 189.49,170.375 150,170.375 149.74,170.375 149.7,170.372 149.66,170.369 149.147,170.288 149.109,170.278 149.07,170.269 148.8,170.182 143.744,175.238 143.691,175.279 143.629,175.304 143.563,175.313 138.481,175.313 138.414,175.304 138.396,175.297 138.353,175.279 138.3,175.238 136.191,173.13 136.151,173.077 136.125,173.015 136.116,172.949 136.116,165.816 129.027,158.727 123.347,158.727 121.809,160.265 121.756,160.305 121.694,160.331 121.628,160.34 120.642,160.34 119.015,161.966 118.569,162.412 118.569,166.721 119.004,167.155 120.127,167.155 120.152,167.145 120.218,167.136 122.036,167.136 122.602,166.57 122.656,166.529 122.717,166.504 122.784,166.495 128.067,166.495 128.133,166.504 128.195,166.529 128.248,166.57 132.82,171.142 132.861,171.195 132.886,171.257 132.895,171.323 132.895,174.316 138.485,179.906 144.394,179.906 145.285,179.016 145.338,178.975 145.399,178.95 145.466,178.941 145.507,178.946 147.877,176.576 147.877,172.542 147.885,172.476 147.911,172.414 147.952,172.361 148.637,171.675 148.691,171.635 148.709,171.627 148.752,171.609 148.819,171.6 149.25,171.6 149.317,171.609 149.378,171.635 149.432,171.675 149.889,172.132 149.929,172.186 149.955,172.247 149.964,172.314 149.964,172.542 149.964,173.972 150.2,174.209 150.563,174.572 156.626,174.572 156.692,174.581 156.754,174.606 156.807,174.647 157.712,175.552 157.753,175.605 157.778,175.667 157.787,175.733 157.787,177.749 157.778,177.816 157.771,177.834 157.753,177.877 157.712,177.93 156.721,178.921 156.668,178.962 156.607,178.987 156.54,178.996 152.938,178.996 148.579,183.355 148.579,189.89
no net on PWR_PLANE (split plane): 161.72,158.752 155.018,158.752 155.018,162.755 161.72,162.755
VCC on PWR_PLANE (split plane): 122.351,187.662 122.412,187.636 122.479,187.628 129.256,187.628 132.383,184.501 132.383,174.422 132.383,174.396 132.383,171.429 127.961,167.007 122.89,167.007 122.323,167.574 122.27,167.614 122.209,167.64 122.142,167.649 122.113,167.649 122.088,167.659 122.022,167.668 120.474,167.668 120.474,169.316 120.474,170.455 121.01,170.991 126.009,170.991 126.076,170.999 126.137,171.025 126.191,171.066 127.499,172.374 127.741,172.616 128.651,172.616 128.717,172.625 128.779,172.651 128.832,172.691 129.747,173.606 129.787,173.659 129.8,173.69 129.813,173.72 129.822,173.787 129.822,177.165 129.813,177.231 129.795,177.275 129.787,177.293 129.747,177.346 128.705,178.388 128.652,178.428 128.59,178.454 128.524,178.463 121.264,178.463 119.23,180.497 119.23,186.127 120.782,187.678 122.329,187.678
VTCDA on PWR_PLANE (split plane): 147.55,196.365 147.52,196.338 147.489,196.313 147.122,195.946 147.097,195.915 147.07,195.885 146.765,195.465 146.744,195.43 146.723,195.396 146.487,194.934 146.472,194.896 146.456,194.86 146.296,194.365 146.287,194.326 146.277,194.288 146.196,193.775 146.193,193.735 146.19,193.695 146.19,193.175 146.193,193.135 146.196,193.095 146.277,192.582 146.287,192.544 146.296,192.505 146.456,192.01 146.472,191.974 146.487,191.936 146.723,191.474 146.744,191.44 146.765,191.405 147.07,190.985 147.097,190.955 147.122,190.924 147.489,190.557 147.52,190.532 147.55,190.505 147.97,190.2 148.005,190.179 148.039,190.158 148.067,190.144 148.067,183.249 148.075,183.182 148.101,183.121 148.142,183.068 152.651,178.559 152.704,178.518 152.747,178.5 152.765,178.492 152.832,178.484 156.434,178.484 157.275,177.643 157.275,175.84 156.519,175.084 150.457,175.084 150.391,175.076 150.329,175.05 150.276,175.009 149.838,174.571 149.526,174.26 149.486,174.207 149.46,174.145 149.451,174.079 149.451,172.542 149.451,172.42 149.144,172.113 148.925,172.113 148.389,172.648 148.389,176.682 148.38,176.749 148.362,176.792 148.355,176.81 148.314,176.864 142.064,183.113 142.064,184.81 142.056,184.877 142.038,184.92 142.03,184.938 141.989,184.992 137.975,189.006 137.975,195.067 139.527,196.619 147.9,196.619

## Other copper
GND_PLANE (plane layer: these items are gaps in the copper):
  lines w0.508: 148.057,164.338 147.149,163.43 144.551,160.833 144.551,157.277 145.543,156.285 148.716,156.285 152.248,159.817 153.071,160.64 159.654,160.64 159.944,160.35 159.944,155.499 159.649,155.204 153.528,155.204 153.314,154.991 153.314,153.67 154.508,152.476 161.315,152.476 162.154,151.638 162.154,150.47 161.112,149.428 147.32,149.428 141.173,155.575 141.173,169.824 143.104,171.755 154.788,171.755 155.856,172.823 155.856,174.065 155.245,174.676 148.582,174.676 147.631,175.627 147.631,176.739 148.641,177.749 158.928,177.749 167.259,177.749 168.402,178.892 168.402,180.34 166.827,181.915 158.471,181.915 156.556,180 142.164,180 140.528,181.635 137.897,181.635 136.169,183.363 136.169,186.411 132.486,190.094 132.486,192.761 133.172,193.446 133.452,193.446 135.001,193.446 138.43,196.875 148.971,196.875 ; 158.471,196.875 159.766,196.875
PWR_PLANE (plane layer: these items are gaps in the copper):
  lines w0.508: 122.022,167.411 118.897,167.411 118.313,166.827 118.313,162.306 118.834,161.785 120.536,160.083 121.628,160.083 123.241,158.471 129.134,158.471 136.373,165.71 136.373,172.949 138.481,175.057 140.678,175.057 143.563,175.057 149.011,169.608 ; 132.639,174.396 132.639,184.607 129.362,187.884 122.479,187.884 122.428,187.935 120.675,187.935 118.974,186.233 118.974,180.391 121.158,178.206 128.524,178.206 129.565,177.165 129.565,173.787 128.651,172.872 127.635,172.872 127.317,172.555 126.009,171.247 120.904,171.247 120.218,170.561 120.218,169.316 120.218,167.392 122.142,167.392 122.784,166.751 128.067,166.751 132.639,171.323 132.639,174.422 138.379,180.162 144.501,180.162 145.466,179.197 ; 147.533,195.52 147.559,195.52 ; 148.323,190.698 148.323,183.249 152.832,178.74 156.54,178.74 157.531,177.749 157.531,175.733 156.626,174.828 150.952,174.828 150.457,174.828 150.019,174.39 149.708,174.079 149.708,172.542 149.708,172.314 149.25,171.856 148.819,171.856 148.133,172.542 148.133,176.682 141.808,183.007 141.808,184.81 137.719,188.9 137.719,195.174 139.421,196.875 148.031,196.875 149.911,196.875 ; 153.235,174.828 154.071,174.828 ; 154.762,163.093 154.762,158.63 154.896,158.496 161.976,158.496 161.976,163.347 161.468,163.347

## Silkscreen, mask and mechanical layers (free items; w line width, h text height)
Bottom Overlay:
  text "VDD" at 123.345,197.315 h0.4
  text "+" at 127.663,197.187 h0.4
  text "OS" at 137.467,184.305 h0.4 r90
  text "VCC" at 117.503,183.898 h0.4 r90
  text "ICG" at 137.467,182.12 h0.4 r90
  text "fM" at 137.547,179.33 h0.4 r90
  text "+" at 117.528,179.077 h0.4
  text "TEST" at 141.171,176.705 h0.4 r270
  text "SH" at 137.569,176.609 h0.4 r90
  text "GND" at 137.569,174.45 h0.4 r90
  text "STEP" at 135.989,173.861 h0.4 r270
  text "VDD" at 137.569,171.783 h0.4 r90
  text "NENBL1" at 135.964,170.94 h0.4 r270
  text "NSLP1" at 135.938,168.476 h0.4 r270
  text "NSLP2" at 135.938,165.707 h0.4 r270
  text "NENBL2" at 135.909,162.892 h0.4 r270
  text "RESERVED" at 173.383,162.151 h0.4
  text "BOOT1" at 184.483,162.1 h0.4
  text "DIR" at 135.938,161.313 h0.4 r270
  text "BOOT1" at 184.33,158.163 h0.4
  text "RE3" at 175.516,158.138 h0.4
  text "GND" at 178.158,158.138 h0.4
  text "GND" at 186.794,158.138 h0.4
  text "WKUP" at 167.947,158.113 h0.4
  text "RE1" at 170.259,158.087 h0.4
  text "RE2" at 172.875,158.087 h0.4
  text "VDD" at 181.308,158.087 h0.4
  text "TEST" at 128.425,156.944 h0.4
  text "SPI" at 186.743,156.766 h0.4
  text "GND" at 135.075,156.563 h0.4 r270
  text "CS2" at 185.753,154.684 h0.4
  text "BOOT0" at 135.075,153.642 h0.4 r270
  text "CS1" at 185.778,152.372 h0.4
  text "VDD" at 135.486,152.326 h0.4 r90
  text "I2C" at 178.285,151.936 h0.4
  text "n.m." at 161.415,150.874 h0.4 r270
  text "GND" at 176.761,150.137 h0.4
  text "SCLK" at 185.778,149.781 h0.4
  text "UART" at 170.741,149.68 h0.4
  text "UART" at 182.349,149.654 h0.4
  text "PROG" at 170.843,149.019 h0.4
  text "DATA" at 182.349,149.019 h0.4
  text "TEST" at 132.209,148.872 h0.4 r90
  text "RST" at 116.792,148.211 h0.4 r90
  text "VDD" at 176.71,147.572 h0.4
  text "TX" at 181.181,147.318 h0.4
  text "TX" at 169.573,147.165 h0.4
  text "MISO" at 185.803,147.165 h0.4
  text "SDA" at 176.634,145.209 h0.4
  text "RX" at 181.155,144.778 h0.4
  text "RX" at 169.577,144.756 h0.4
  text "MOSI" at 185.803,144.676 h0.4
  text "SWO" at 132.235,144.041 h0.4
  text "GND" at 126.85,144.016 h0.4
  text "NRST" at 129.873,144.016 h0.4
  text "VDD" at 139.956,143.965 h0.4
  text "SWCLK" at 134.902,143.914 h0.4
  text "SWDIO" at 137.366,143.838 h0.4
  text "SWD" at 124.589,142.903 h0.4 r90
  text "SCL" at 176.659,142.593 h0.4
  text "GND" at 181.155,142.187 h0.4
  text "GND" at 169.573,142.161 h0.4
  text "GND" at 185.803,142.085 h0.4
Mechanical 1:
  lines w0.001: 190,163.265 150,163.265 cw(c150,166.565) 150,169.865 190,169.865 ; 190,190.135 150,190.135 cw(c150,193.435) 150,196.735 190,196.735
  lines w0.1: 190,163.265 190,169.865 ; 190,190.135 190,196.735 ; 115.697,140 190,140 190,207.391 115.697,207.391 115.697,140
Guias:
  lines w0.1: 115.748,180 190,180 ; 150,140 150,220 ; 163.435,140 163.435,220 ; 176.87,140 176.87,220